# EAGLE board IV6 nixie board (EAGLE 6.3)

Size 100 x 80 mm. Coordinates in mm from the lower left corner, seen from the top.
Outline: 0,0 100,0 100,80 0,80 0,0
Copper layers (1*16): Top 0.035mm / dielectric 1.5mm / Bottom 0.035mm
Design rules "default": minimum track width 10mil, minimum drill 24mil, track to track 8mil, track to pad 8mil, pad to pad 8mil, via to via 8mil, smd to smd 8mil, copper to edge 40mil, drill to drill 8mil, minimum pad ring 10mil, minimum via ring 8mil, stop-mask expansion 4mil, vias tented up to drill 0mil, thermal gap 10mil

## Footprints (pad centres in the part's own frame; a part is rotated, then mirrored left to right if it is on the bottom)
1X04 = drill 1.016 pad 1.88 square: 1 0,0 | drill 1.016 pad 1.88: 2 2.54,0; 3 5.08,0; 4 7.62,0
IV6_NUMITRON_PAC_LARGE = drill 0.8: BL -5.08,2.857; BOT -5.715,0; BR 3.493,-5.08; DOT 5.08,-2.857; FIL_M -5.08,-2.857; FIL_P -3.493,-5.08; GRID_P 0,-5.715; MID 0,5.715; TL -3.493,5.08; TOP 3.493,5.08; TR 5.08,2.857 | drill 0.8 square: NC 5.715,0
TO92-EBC = drill 0.813 long: B 0,-1.27; C -2.54,-1.27; E 2.54,-1.27
0204/7 = drill 0.813 octagon: 1 -3.81,0; 2 3.81,0
DIL16_SO16_PAC2 = drill 0.813 long: 1 -8.89,-2.54; 2 -6.35,-2.54; 3 -3.81,-2.54; 4 -1.27,-2.54; 5 1.27,-2.54; 6 3.81,-2.54; 7 6.35,-2.54; 8 8.89,-2.54; 9 8.89,5.08; 10 6.35,5.08; 11 3.81,5.08; 12 1.27,5.08; 13 -1.27,5.08; 14 -3.81,5.08; 15 -6.35,5.08; 16 -8.89,5.08 | smd 0.635 x 2.032: S1 -5.08,-5.715; S2 -3.81,-5.715; S3 -2.54,-5.715; S4 -1.27,-5.715; S5 0,-5.715; S6 1.27,-5.715; S7 2.54,-5.715; S8 3.81,-5.715; S9 3.81,0.635; S10 2.54,0.635; S11 1.27,0.635; S12 0,0.635; S13 -1.27,0.635; S14 -2.54,0.635; S15 -3.81,0.635; S16 -5.08,0.635

## Placement (x,y rotation side)
JP_POWER  [1X04]  63.5,29.21 0 top
NIXIE1  IV6_NUMITRONLARGE  [IV6_NUMITRON_PAC_LARGE]  20.32,11.43 0 top
NIXIE2  IV6_NUMITRONLARGE  [IV6_NUMITRON_PAC_LARGE]  38.1,11.43 0 top
Q1  BC449  [TO92-EBC]  54.61,8.89 0 top
Q2  BC449  [TO92-EBC]  83.82,24.13 0 top
Q3  BC449  [TO92-EBC]  76.2,24.13 0 top
Q4  BC449  [TO92-EBC]  68.58,24.13 0 top
Q5  BC449  [TO92-EBC]  60.96,24.13 0 top
Q6  BC449  [TO92-EBC]  53.34,24.13 0 top
Q7  BC449  [TO92-EBC]  83.82,33.02 0 top
Q8  BC449  [TO92-EBC]  76.2,33.02 0 top
R1  [0204/7]  55.88,29.21 0 top
R2  [0204/7]  82.55,38.1 0 top
R3  [0204/7]  72.39,38.1 0 top
R4  [0204/7]  62.23,38.1 0 top
R5  [0204/7]  52.07,38.1 0 top
R6  [0204/7]  82.55,41.91 0 top
R7  [0204/7]  72.39,41.91 0 top
R8  [0204/7]  62.23,41.91 0 top
U$1  74HC595_SMDDIP_COMBOTHINPAD  [DIL16_SO16_PAC2]  29.21,31.75 0 top

## Library data of the parts
JP_POWER = SparkFun-Connectors
NIXIE1 NIXIE2 U$1 = kalshagar
Q1-Q8 = transistor-npn
R1-R8 = resistor

## Nets
GND: JP_POWER.1 NIXIE1.FIL_M NIXIE2.FIL_M U$1.8 U$1.S8
N$1: NIXIE1.BOT NIXIE2.BOT Q1.E
N$2: NIXIE1.DOT NIXIE2.DOT Q2.E
N$3: NIXIE1.BR NIXIE2.BR Q3.E
N$4: NIXIE1.BL NIXIE2.BL Q4.E
N$5: NIXIE1.MID NIXIE2.MID Q5.E
N$6: NIXIE1.TL NIXIE2.TL Q6.E
N$7: NIXIE1.TR NIXIE2.TR Q7.E
N$8: NIXIE1.TOP NIXIE2.TOP Q8.E
N$12: NIXIE1.NC NIXIE2.NC
N$13: R1.1 U$1.15 U$1.S15
N$14: Q1.B R1.2
N$15: R2.1 U$1.1 U$1.S1
N$16: Q2.B R2.2
N$17: R3.1 U$1.2 U$1.S2
N$18: Q3.B R3.2
N$19: R4.1 U$1.3 U$1.S3
N$20: Q4.B R4.2
N$22: R5.1 U$1.4 U$1.S4
N$23: Q5.B R5.2
N$25: R6.1 U$1.5 U$1.S5
N$26: Q6.B R6.2
N$28: R7.1 U$1.6 U$1.S6
N$29: Q7.B R7.2
N$31: R8.1 U$1.7 U$1.S7
N$32: Q8.B R8.2
VCC_1.5: JP_POWER.2 NIXIE1.FIL_P NIXIE2.FIL_P
VCC_5: JP_POWER.3 U$1.16 U$1.S16
VCC_HI: JP_POWER.4 NIXIE1.GRID_P NIXIE2.GRID_P Q1.C Q2.C Q3.C Q4.C Q5.C Q6.C Q7.C Q8.C

## Tracks (layer width: path | path; a pad name or v marks a point on that pad's centre or on a via)
GND  (4 unrouted)
N$1  (2 unrouted)
N$2  (2 unrouted)
N$3  (2 unrouted)
N$4  (2 unrouted)
N$5  (2 unrouted)
N$6  (2 unrouted)
N$7  (2 unrouted)
N$8  (2 unrouted)
N$12  (1 unrouted)
N$13  (2 unrouted)
N$14  (1 unrouted)
N$15  (2 unrouted)
N$16  (1 unrouted)
N$17  (2 unrouted)
N$18  (1 unrouted)
N$19  (2 unrouted)
N$20  (1 unrouted)
N$22  (2 unrouted)
N$23  (1 unrouted)
N$25  (2 unrouted)
N$26  (1 unrouted)
N$28  (2 unrouted)
N$29  (1 unrouted)
N$31  (2 unrouted)
N$32  (1 unrouted)
VCC_1.5  (2 unrouted)
VCC_5  (2 unrouted)
VCC_HI  (10 unrouted)